# Altium PCB K10P100最小系统V1.0.PcbDoc (part 2 of 2)
Units mil, origin at the board's own origin, x right, y up, seen from the top; angles counter-clockwise.
Board outline 4763.81 x 2088.61 mil, 2 copper layers (Top Layer, Bottom Layer); 125 components, 121 nets, 468 pads, 200 vias.
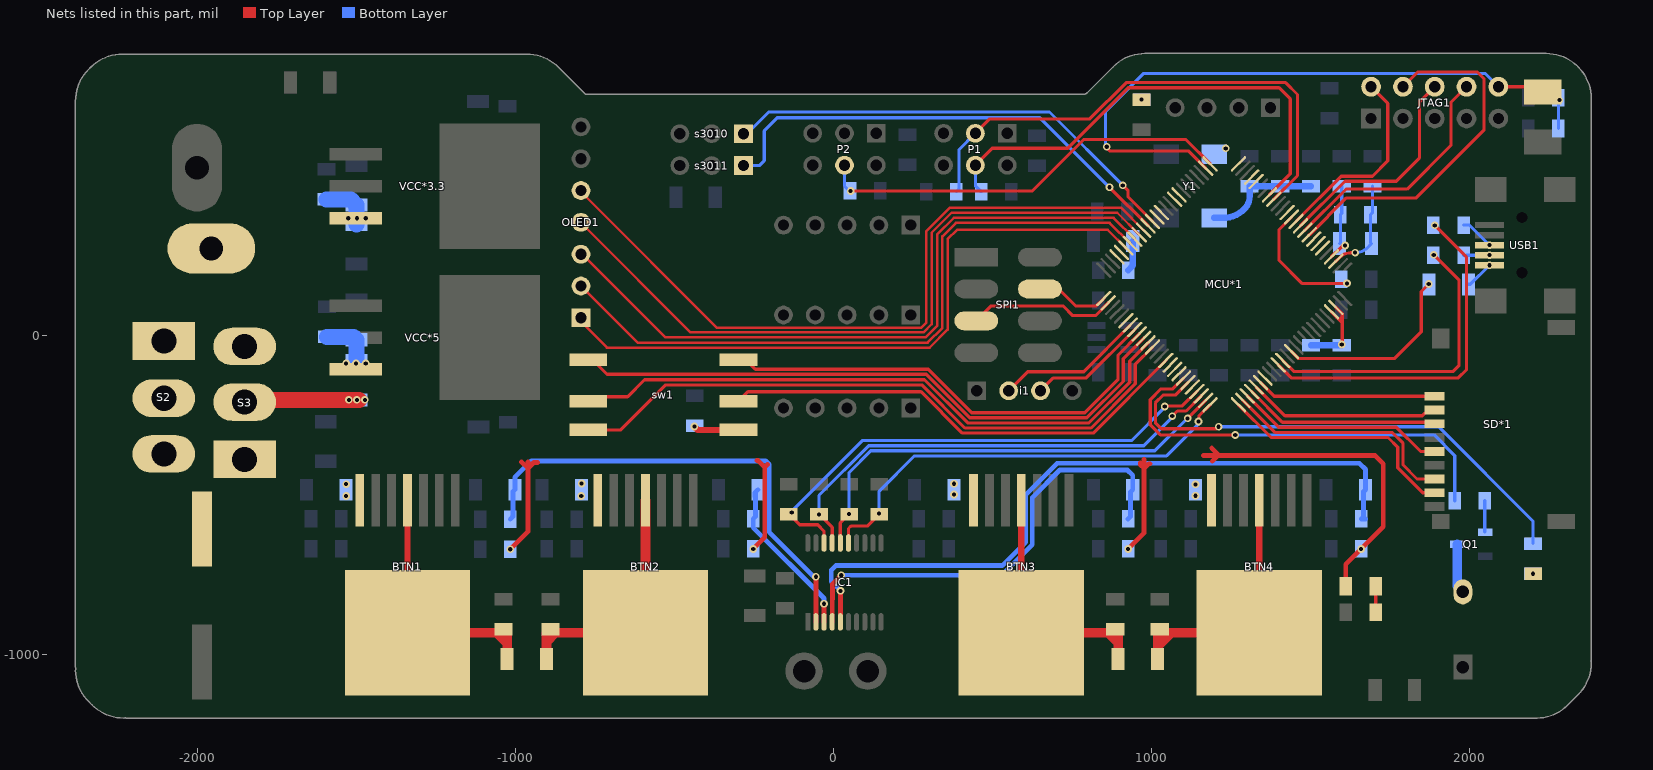
[diagram p2: the nets of this part, all layers, seen from the top]

## Via types
v1: diameter 24, hole 13, Top Layer to Bottom Layer, 198 vias
v2: diameter 39.37, hole 39.37, Top Layer to Bottom Layer, 2 vias

## Nets (pads, with @x,y where several pads share a name; then routed paths per layer and width w, separated by ;. In a path a pad name is that pad's centre, name@x,y a point inside that pad or via, vN(x,y) a via of type N, cw(c..) or ccw(c..) an arc to the next point about the centre after c; other vN are vias at no path point) (continued)
NetC10_2: C10.2 L1.2 MCU*1.22 MCU*1.23 | length 283.5
  Top Layer w10: MCU*1.22@1565.2,76.1 1590.33,50.96 ; MCU*1.23@1579.12,90.02 1599.41,69.73 1599.41,60.04 ; v1(1597.44,-26.57) 1599.41,-24.61 1599.41,41.89 ; 1590.33,50.96 1599.41,41.89 ; 1590.33,50.96 1599.41,60.04 ; 1599.41,41.89 1599.41,60.04
  Bottom Layer w20: C10.2@1500.98,-29.53 L1.2@1597.44,-29.53
NetC15_2: C15.2 C16.2 L2.2 Y1.4 | length 371.7
  Bottom Layer w20: Y1.4@1196.26,371.06 1224.8,371.06 ccw(c1224.8,465.16) 1291.34,398.62 ccw(c1250.94,439.02) 1308.07,439.02 C16.2@1308.07,470.47 C15.2@1404.53,470.47 L2.2@1500.98,470.47
NetC17_2: C17.2 MCU*1.28 R7.1 Y2.1 | length 314.2
  Top Layer w10: MCU*1.28@1579.12,234.78 1592.12,247.78 cw(c1625.99,213.89) 1625.99,261.81 v1(1639.76,261.81)
  Bottom Layer w10: v1(1639.76,261.81) ccw(c1639.76,316.46) 1678.41,277.82 Y2.1@1690.94,290.35 1687.99,293.31 R7.1@1687.99,380.91 1693.9,386.81 C17.2@1693.9,470.47
NetC18_2: C18.2 MCU*1.29 R7.2 Y2.2 | length 239.9
  Top Layer w10: MCU*1.29@1565.2,248.7 1595.76,279.27 cw(c1608.27,266.77) v1(1608.27,284.45)
  Bottom Layer w10: Y2.2@1590.94,290.35 1593.5,292.91 R7.2@1593.5,380.91 1597.44,384.84 C18.2@1597.44,470.47
NetC31_1: C31.1 C33.2 F2.2 VCC*5.3 | length 161.1
  Bottom Layer w50: C33.2@-1591.54,-2.95 -1507.87,-2.95 C31.1@-1499.02,-11.81 F2.2@-1499.02,-76.77
  other v1: -1531.5,-86.61 -1500.49,-86.61 -1469.49,-86.61
NetC35_1: C35.1 C37.2 F3.2 VCC*3.3.3 | length 161.9
  Bottom Layer w50: C37.2@-1592.52,429.13 -1516.73,429.13 C35.1@-1499.02,411.42 F3.2@-1499.02,350.39
  other v1: -1524.61,370.08 -1497.05,370.08 -1469.49,370.08
NetD1_2: D1.2 F1.2 | length 97.7
  Bottom Layer w20: F1.2@926.18,206.69 940.94,221.46 D1.2@940.94,298.23
NetD3_1: D3.1 R1.1
  other v1: 968.5,743.11
NetD5_1: D5.1 R5.1
  other v1: 2198.82,-747.05
NetD6_2: D6.2 R21.2 | length 81.7
  Top Layer w10: R21.2@1704.72,-868.11 D6.2@1704.72,-786.42
NetD7_2: D7.2 IC1.4 R26.1 | length 1448.7
  Top Layer w15: IC1.4@-3.78,-898.62 -3.78,-827.6 -2.95,-826.77 -2.95,-779.53 v1(24.61,-751.97)
  Bottom Layer w15: v1(24.61,-751.97) 529.53,-751.97 625.16,-656.33 625.16,-507.71 711.71,-421.17 924.12,-421.17 940.94,-437.99 D7.2@940.94,-483.27 934.06,-490.16 934.06,-566.93 R26.1@926.18,-574.8
NetD8_2: D8.2 IC1.5 R27.2 | length 2263.2
  Top Layer w15: IC1.5@21.81,-898.62 22.55,-897.89 v1(22.55,-801.18)
  Bottom Layer w15: v1(22.55,-801.18) -6.89,-771.74 -6.89,-735.59 7.24,-721.46 530.34,-721.46 604.16,-647.63 604.16,-499.01 703.01,-400.17 1653.12,-400.17 1672.24,-419.29 D8.2@1672.24,-483.27 1666.34,-489.17 1666.34,-567.91 R27.2@1659.45,-574.8 R27.2@1673.23,-574.8
NetD9_2: D9.2 IC1.2 R36.1 | length 1522.8
  Top Layer w15: IC1.2@-54.96,-898.62 -55.03,-898.56 -55.03,-756.96 v1@-54.96,-756.89
  Bottom Layer w15: R36.1@-1015.75,-575.79 -1006.89,-566.93 -1006.89,-489.17 D9.2@-1000.98,-483.27 -1000.98,-443.9 -949.8,-392.72 -212.6,-392.72 -201.77,-403.54 -201.77,-617.14 -62.03,-756.89 v1(-55.12,-756.89)
NetD10_2: D10.2 IC1.3 R37.2 | length 539.3
  Top Layer w15: IC1.3@-29.37,-898.62 v1@-29.37,-841.54
  Bottom Layer w15: D10.2@-247.05,-504.92 -247.05,-493.11 D10.2@-237.2,-483.27 -245.08,-491.14 -245.08,-567.91 R37.2@-251.97,-574.8 -251.97,-602.36 -29.53,-824.8 v1(-29.53,-841.54)
NetLS1_2: LS1.2A Q1.3 | length 156.9
  Bottom Layer w30: Q1.3@1960.63,-654.53 1960.63,-786.42 LS1.2A@1978.35,-804.13
NetQ1_2: Q1.1 R17.1 | length 97.4
  Bottom Layer w10: Q1.1@2047.24,-615.16 R17.1@2047.24,-517.72
NetR2_1: R2.1 USB1.3 | length 107.8
  Bottom Layer w10: R2.1@1980.32,348.43 1999.01,348.43 v1(2062.01,285.43)
NetR3_1: R3.1 USB1.2 | length 81.7
  Bottom Layer w10: R3.1@1980.32,253.94 v1(2062.01,253.93)
NetR8_2: R8.2 sw1.4 | length 143.3
  Top Layer w20: v1(-437.01,-284.45) -426.18,-295.28 sw1.4@-298.23,-295.28
OLEDCLK: MCU*1.66 OLED1.5 | length 2317.2
  Top Layer w8: OLED1.5@-793.31,445.28 -779.92,458.66 -779.92,439.37 -366.97,26.42 276.78,26.42 292.32,41.96 292.32,329.26 365.37,402.32 904.92,402.32 MCU*1.66@975.01,332.22
OLEDCS: MCU*1.70 OLED1.1 | length 2105.9
  Top Layer w8: OLED1.1@-785.43,53.15 -785.43,37.4 -711.45,-36.58 302.88,-36.58 359.25,19.79 359.25,304.13 388.78,333.66 862.21,333.66 MCU*1.70@919.34,276.54
  Top Layer w10: OLED1.1@-793.31,45.28 OLED1.1@-785.43,53.15
OLEDDC: MCU*1.69 OLED1.2 | length 2163.4
  Top Layer w8: OLED1.2@-793.31,157.48 -615.24,-20.58 296.25,-20.58 342.52,25.69 342.52,312.99 384.84,355.32 868.4,355.32 MCU*1.69@933.25,290.46
  Top Layer w10: OLED1.2@-793.31,145.28 OLED1.2@-793.31,157.48
OLEDMISO: MCU*1.67 OLED1.4 | length 2264.8
  Top Layer w8: OLED1.4@-780.32,358.27 -780.32,343.31 -448.43,11.42 282.99,11.42 309.06,37.48 309.06,324.78 371.59,387.32 892.08,387.32 MCU*1.67@961.09,318.3
  Top Layer w10: OLED1.4@-793.31,345.28 OLED1.4@-780.32,358.27
OLEDRST: MCU*1.68 OLED1.3 | length 2213.8
  Top Layer w8: OLED1.3@-779.72,258.86 -779.72,247.24 -527.9,-4.58 289.62,-4.58 325.79,31.58 325.79,318.89 378.22,371.32 880.24,371.32 MCU*1.68@947.17,304.38
  Top Layer w10: OLED1.3@-793.31,245.28 OLED1.3@-779.72,258.86
OUT1: BTN1.4 BTN1.8 C12.1 Ry2.1 | length 867
  Top Layer w20: BTN1.8@-1338.58,-932.44 BTN1.4@-1338.58,-516.65
  Top Layer w30: BTN1.8@-1338.58,-932.44 C12.1@-1058.7,-932.44 ; Ry2.1@-1025.59,-1015.75 -1025.59,-965.55 ; C12.1@-1058.7,-932.44 -1025.59,-965.55 ; C12.1@-1058.7,-932.44 -1046.61,-932.44 C12.1@-1036.42,-922.24 -1025.59,-933.07 -1025.59,-965.55
OUT2: BTN2.4 BTN2.8 C7.1 Ry2.2 | length 875.4
  Top Layer w30: Ry2.2@-901.57,-1015.75 -901.57,-961.61 ; -855.32,-932.44 C7.1@-872.4,-932.44 ; BTN2.4@-590.55,-516.65 BTN2.8@-590.55,-932.44 C7.1@-872.4,-932.44 ; -901.57,-961.61 C7.1@-872.4,-932.44 ; -901.57,-961.61 -901.57,-935.04 C7.1@-888.78,-922.24 -878.58,-932.44 C7.1@-872.4,-932.44
OUT3: BTN3.4 BTN3.8 C11.1 Ry1.1 | length 856.5
  Top Layer w20: BTN3.8@590.55,-932.44 BTN3.4@590.55,-516.65
  Top Layer w30: BTN3.8@590.55,-932.44 C11.1@863.54,-932.44 ; Ry1.1@894.69,-1015.75 894.69,-963.58 ; C11.1@863.54,-932.44 894.69,-963.58 ; C11.1@863.54,-932.44 875.63,-932.44 C11.1@885.83,-922.24 894.69,-931.1 894.69,-963.58
OUT4: BTN4.4 BTN4.8 C25.2 Ry1.2 | length 892
  Top Layer w20: C25.2@1018.7,-929.13 C25.2@1025.59,-922.24 C25.2@1035.79,-932.44 ; BTN4.8@1338.58,-932.44 BTN4.4@1338.58,-516.65
  Top Layer w30: Ry1.2@1018.7,-1015.75 1018.7,-976.73 ; C25.2@1018.7,-929.13 1018.7,-976.73 ; C25.2@1035.79,-932.44 1062.99,-932.44 ; BTN4.8@1338.58,-932.44 1062.99,-932.44 ; 1018.7,-976.73 1062.99,-932.44
PCS0: MCU*1.76 SPI1.6 | length 232.3
  Top Layer w10: SPI1.6@649.13,147.52 707.8,147.52 760.83,94.49 826.37,94.49 MCU*1.76@849.74,117.86
PTA0: JTAG1.4 MCU*1.34 | length 1129.4
  Top Layer w10: MCU*1.34@1495.6,318.3 1496.43,318.3 1612.18,434.06 1831.69,434.06 2044.29,646.65 2044.29,809.06 2023.62,829.72 1836.22,829.72 JTAG1.4@1789.76,783.27
PTA1: JTAG1.8 MCU*1.35 | length 774
  Top Layer w10: MCU*1.35@1481.68,332.22 1611.08,461.61 1803.15,461.61 1940.94,599.41 1940.94,734.45 JTAG1.8@1989.76,783.27
PTA2: JTAG1.6 MCU*1.36 | length 706.2
  Top Layer w10: MCU*1.36@1467.76,346.14 1607.84,486.22 1768.7,486.22 1841.54,559.05 1841.54,735.04 JTAG1.6@1889.76,783.27
PTA3: JTAG1.2 MCU*1.37 | length 621.8
  Top Layer w10: MCU*1.37@1453.84,360.06 1596,502.22 1694.15,502.22 1742.13,550.2 1742.13,730.91 JTAG1.2@1689.76,783.27
PTA4: MCU*1.38 R4.2 | length 396.4
  Top Layer w10: MCU*1.38@1439.92,373.98 1400.59,334.65 1400.59,237.2 1472.44,165.35 v1(1614.17,165.35)
PTA5: MCU*1.39
PTA12: MCU*1.42 P1.3 R13.1 | length 1662.1
  Top Layer w10: P1.3@446.26,636.81 491.54,682.09 806.12,682.09 920.3,796.26 1421.26,796.26 1458.66,758.86 1458.66,504.07 MCU*1.42@1384.24,429.65
  Bottom Layer w10: R13.1@385.83,453.74 394.68,462.6 394.68,585.24 P1.3@446.26,636.81
PTA13: MCU*1.43 P1.4 R15.2 | length 1524.5
  Top Layer w10: P1.4@446.26,536.81 499.27,589.82 736.48,589.82 926.92,780.26 1400.84,780.26 1436.02,745.08 1436.02,509.27 MCU*1.43@1370.32,443.57
  Bottom Layer w10: P1.4@446.26,536.81 446.26,472.05 R15.2@464.57,453.74
PTA16: MCU*1.46
PTA17: MCU*1.47
PTA18: MCU*1.50 Y1.3
  other v1: 1233.27,589.57
PTA19: MCU*1.51 P2.4 R9.1 | length 1318.6
  Top Layer w10: v1(54.13,455.71) 625,455.71 786.78,617.49 1107.33,617.49 MCU*1.51@1183.8,541.01
  Bottom Layer w10: P2.4@34.84,536.81 34.84,471.06 R9.1@52.17,453.74
PTB10: MCU*1.58
PTB11: MCU*1.59
PTB16: MCU*1.62
PTB17: MCU*1.63
PTB18: MCU*1.64 s3010.1 | length 1467.5
  Top Layer w10: v1(909.45,473.43) 926.18,456.69 926.18,436.73 MCU*1.64@1002.85,360.06
  Bottom Layer w10: s3010.1@-282.48,635.83 -271.65,635.83 -203.74,703.74 679.13,703.74 v1(909.45,473.43)
PTB19: MCU*1.65 s3011.1 | length 1529.3
  Top Layer w10: v1(867.55,467.52) MCU*1.65@988.93,346.14
  Bottom Layer w10: s3011.1@-282.48,535.43 -233.27,535.43 -217.52,551.18 -217.52,644.68 -176.18,686.02 649.05,686.02 v1(867.55,467.52)
PTC1: MCU*1.71
PTC2: MCU*1.72
PTC5: MCU*1.77 SPI1.3 | length 463.2
  Top Layer w10: SPI1.3@449.13,47.52 496.1,94.49 721.46,94.49 751.97,63.98 823.69,63.98 MCU*1.77@863.66,103.94
PTC9: MCU*1.81
PTC10: i1.2 MCU*1.82 | length 468
  Top Layer w10: i1.2@550.79,-172.24 610.83,-112.2 786.71,-112.2 MCU*1.82@933.25,34.34
PTC11: i1.3 MCU*1.83 | length 376.2
  Top Layer w10: i1.3@650.79,-172.24 691.32,-131.72 795.03,-131.72 MCU*1.83@947.17,20.42
PTC12: MCU*1.84 sw1.6 | length 1470.1
  Top Layer w10: sw1.6@-287.4,-62.01 -245.08,-104.33 298.23,-104.33 435.04,-241.14 789.97,-241.14 894.68,-136.43 894.68,-59.9 MCU*1.84@961.09,6.5
PTC13: MCU*1.85 sw1.1 | length 1972.1
  Top Layer w10: sw1.1@-770.67,-61.02 -711.36,-120.33 291.58,-120.33 428.39,-257.14 796.6,-257.14 910.68,-143.06 910.68,-71.74 MCU*1.85@975.01,-7.42
PTC14: MCU*1.86 sw1.2 | length 1980.7
  Top Layer w10: sw1.2@-770.67,-190.94 -646.65,-190.94 -593.5,-137.8 286.42,-137.8 421.76,-273.14 803.23,-273.14 931.1,-145.27 931.1,-79.16 MCU*1.86@988.93,-21.33
PTC15: MCU*1.87 sw1.3 | length 2029
  Top Layer w10: sw1.3@-770.67,-295.28 -668.31,-295.28 -526.83,-153.8 277.81,-153.8 413.16,-289.14 809.85,-289.14 948.82,-150.18 948.82,-89.29 MCU*1.87@1002.85,-35.25
PTC16: MCU*1.90 sw1.5 | length 1503.4
  Top Layer w10: sw1.5@-298.23,-204.72 -268.7,-175.2 275.59,-175.2 405.54,-305.14 816.48,-305.14 MCU*1.90@1044.61,-77.01
PTC17: MCU*1.91
PTC18: MCU*1.92
PTD0: MCU*1.93
PTD1: MCU*1.94 R17.2 | length 1350.1
  Top Layer w10: MCU*1.94@1100.29,-132.69 1066.64,-166.34 1029.53,-166.34 996.06,-199.8 996.06,-279.53 1027.56,-311.02 v1(1262.8,-311.02)
  Bottom Layer w10: v1(1262.8,-311.02) 1887.8,-311.02 1952.76,-375.98 R17.2@1952.76,-517.72
PTD2: D5.2 MCU*1.95 | length 1581.8
  Top Layer w10: MCU*1.95@1114.21,-146.61 1075.78,-185.04 1037.4,-185.04 1012.06,-210.38 1012.06,-272.9 1030.86,-291.7 1204.36,-291.7 v1(1210.63,-285.43)
  Bottom Layer w10: v1(1210.63,-285.43) 1902.56,-285.43 2198.82,-581.69 D5.2@2198.82,-652.56
PTD3: MCU*1.96
PTD4: IC1.18 MCU*1.97 R42.1 | length 1611.1
  Top Layer w10: R42.1@-139.76,-560.04 -106.3,-593.5 -49.21,-593.5 -29.37,-613.35 IC1.18@-29.37,-650.59 ; v1(1041.34,-221.46) 1042.94,-219.86 1096.64,-219.86 MCU*1.97@1142.05,-174.45
  Bottom Layer w10: v1(-130.91,-555.12) -135.83,-555.12 90.32,-328.97 936.78,-328.97 v1@1042.82,-222.93
PTD5: IC1.17 MCU*1.98 R43.1 | length 1499.7
  Top Layer w10: R43.1@-45.28,-560.04 -3.78,-601.54 IC1.17@-3.78,-650.59 ; v1(1064.96,-251.97) 1081.07,-235.86 1108.48,-235.86 MCU*1.98@1155.97,-188.37
  Bottom Layer w10: v1(-45.28,-561.02) -45.28,-500.99 110.75,-344.97 975.9,-344.97 v1@1066.93,-253.94
PTD6: IC1.16 MCU*1.99 R44.1 | length 1446.1
  Top Layer w10: IC1.16@21.81,-650.59 21.81,-587.44 R44.1@49.21,-560.04 ; v1(1113.31,-258.86) MCU*1.99@1169.88,-202.29
  Bottom Layer w10: v1(49.21,-559.06) 49.21,-429.13 117.38,-360.97 1010.09,-360.97 v1@1112.76,-258.3
PTD7: IC1.15 MCU*1.100 R45.1 | length 1402
  Top Layer w10: IC1.15@47.4,-650.59 47.4,-605.16 55.12,-597.44 106.3,-597.44 R45.1@143.7,-560.04 ; v1(1147.64,-268.7) 1147.64,-272.64 1148.62,-273.62 1148.62,-251.39 MCU*1.100@1183.8,-216.21
  Bottom Layer w10: v1(143.7,-558.07) 143.7,-488.19 254.92,-376.97 1047.24,-376.97 v1@1149.61,-274.61
PTE0: MCU*1.1 SD*1.8 | length 769.2
  Top Layer w10: MCU*1.1@1272.89,-216.21 1375.58,-318.9 1743.11,-318.9 1773.62,-349.41 1773.62,-414.37 1851.95,-492.7 SD*1.8@1889.5,-492.7
PTE1: MCU*1.2 SD*1.7 | length 744.8
  Top Layer w10: MCU*1.2@1286.81,-202.29 1387.42,-302.9 1755.65,-302.9 1790.35,-337.6 1790.35,-405.51 1834.24,-449.39 SD*1.7@1889.5,-449.39
PTE2: MCU*1.3 SD*1.5 | length 661
  Top Layer w10: MCU*1.3@1300.73,-188.37 1399.26,-286.9 1769.18,-286.9 1845.06,-362.78 SD*1.5@1889.5,-362.78
PTE3: MCU*1.4 SD*1.3 | length 617
  Top Layer w10: MCU*1.4@1314.65,-174.45 1411.1,-270.9 1884.24,-270.9 SD*1.3@1889.5,-276.17
PTE4: MCU*1.5 SD*1.2 | length 605.9
  Top Layer w10: MCU*1.5@1328.57,-160.53 1419.02,-250.98 1850.39,-250.98 1868.52,-232.86 SD*1.2@1889.5,-232.86
PTE5: MCU*1.6 SD*1.1 | length 564.8
  Top Layer w10: MCU*1.6@1342.49,-146.61 1385.43,-189.55 SD*1.1@1889.5,-189.55
PTE6: MCU*1.7
PTE24: MCU*1.31
PTE25: MCU*1.32
PTE26: MCU*1.33
RESET: C14.2 JTAG1.10 MCU*1.52 R6.1 S1.2 | length 1999.2
  Top Layer w10: v1(859.25,594.49) 855.32,594.49 868.11,581.69 1115.28,581.69 MCU*1.52@1169.88,527.09 ; JTAG1.10@2089.76,783.27 2212.83,783.27 S1.2@2229.37,766.73
  Bottom Layer w10: v1(859.25,594.49) 855.32,594.49 855.32,705.71 974.87,825.27 2047.76,825.27 JTAG1.10@2089.76,783.27 ; C14.2@2278.54,652.56 2278.54,738.19 v1(2281.5,741.14)
USB0_DM: MCU*1.11 R3.2 | length 956.8
  Top Layer w10: MCU*1.11@1412.08,-77.01 1446.29,-111.22 1947.83,-111.22 1966.54,-92.52 1966.54,175.2 v1(1886.81,254.92)
USB0_DP: MCU*1.10 R2.2 | length 1114.3
  Top Layer w10: MCU*1.10@1398.16,-90.93 1439.12,-131.89 1963.58,-131.89 1990.16,-105.32 1990.16,247.05 v1(1889.76,347.44)
USB5V: D4.1 USB1.1 | length 90.8
  Bottom Layer w10: D4.1@1996.06,162.4 2001.97,162.4 v1(2062.01,222.44)
VBAT: S2.0 S2.1 S3.2 T*.1
VCC: F2.1 S3.0 S3.1 | length 366.3
  Top Layer w50: S3.1@-1850.39,-207.8 -1850.39,-201.77 v1@-1490.16,-201.77
  other v1: -1522.64,-200.79 -1497.54,-200.79 -1472.44,-200.79
VCC_M: BTN1.7 BTN2.7 BTN3.7 BTN4.7 C22.1 C23.1 C24.1 C27.1 C28.1 D6.1 R22.2 R23.1 R32.2 R33.1 S2.2 | length 2099.5
  Top Layer w15: v1(-1015.75,-670.28) -959.65,-614.17 -959.65,-416.34 ; -980.32,-395.67 -959.65,-416.34 ; -959.65,-395.67 -959.65,-416.34 ; -930.12,-397.64 -940.94,-397.64 -959.65,-416.34 ; v1(-251.97,-669.29) -215.55,-632.87 -215.55,-412.4 ; -240.16,-391.73 -236.22,-391.73 -215.55,-412.4 ; -206.69,-403.54 -215.55,-412.4 ; v1(926.18,-669.29) 976.38,-619.09 976.38,-416.34 ; 964.57,-398.62 964.57,-404.53 976.38,-416.34 ; 976.38,-387.8 976.38,-416.34 ; 995.08,-401.57 991.14,-401.57 976.38,-416.34 ; 1163.39,-375.98 1208.66,-375.98 ; 1188.98,-352.36 1212.6,-375.98 ; 1190.94,-393.7 1208.66,-375.98 ; D6.1@1610.24,-786.42 1610.24,-717.52 v1(1658.46,-669.29) 1728.35,-599.41 1728.35,-401.57 1702.76,-375.98 1212.6,-375.98 ; 1208.66,-375.98 1212.6,-375.98
  other v1: -1531.5,-502.95 -792.32,-502.95 1137.8,-501.97 378.94,-498.03 1137.8,-466.54 -1531.5,-465.55 378.94,-464.57 -791.34,-463.58
VREGIN: D4.2 MCU*1.13 | length 611.1
  Top Layer w10: MCU*1.13@1439.92,-49.17 1461.12,-70.37 1764.27,-70.37 1847.44,12.8 1847.44,139.76 v1(1871.06,163.39)
pads on no net: MCU*1.14 MCU*1.15 MCU*1.16 MCU*1.17 MCU*1.18 MCU*1.19 MCU*1.20 MCU*1.21 MCU*1.26 MCU*1.27 P1.5 P1.6 P2.3 P2.5 P2.6 SD*1.10 SD*1.11 SD*1.12 SD*1.13 USB1.5 USB1.6 USB1.7 USB1.8 USB1.9 USB1.MH1 USB1.MH2 Y1.1
copper on no net:
  other v2: 2302.89,-473.02 2302.89,-158.05

## Polygon pours and split planes (outlines as drawn)
PTA18 on Top Layer "Keep-Out Layer-No Net" (solid, remove dead copper, pour order 44): 1234.25,598.43 1260.83,598.43 1297.24,562.01 1252.95,517.72 1250,517.72 1224.41,543.31 1224.41,594.49
VCC_M on Top Layer "Keep-Out Layer-No Net" (solid, pour order 27): 1735.24,-414.37 1735.24,-345.47 1723.43,-333.66 -1721.46,-333.66 -1725.39,-333.66 -1727.36,-335.63 -1727.36,-353.35
VCC_M on Top Layer "Keep-Out Layer-No Net" (solid, pour order 40): -1506.89,-341.54 -1727.36,-341.54 -1727.36,-518.7 -1695.87,-550.2 -1675.2,-529.53 -1570.87,-529.53
VCC_M on Top Layer "Keep-Out Layer-No Net" (solid, remove dead copper, pour order 28): -2156.5,-312.01 -2058.07,-312.01 -2050.2,-312.01 -2005.91,-356.3 -2005.91,-429.13 -1949.8,-485.24 -1948.82,-486.22 -1948.82,-725.39 -2106.3,-725.39 -2181.1,-650.59 -2204.72,-626.97 -2204.72,-365.16
VCC_M on Top Layer "Keep-Out Layer-No Net" (solid, remove dead copper, pour order 30): -1984.25,-725.89 -1610.2,-725.89 -1474.56,-599.9 -1472.44,-597.93 -1472.44,-433.56 -1662.12,-433.56 -1699.21,-468.01 -1719.34,-486.71 -1984.25,-486.71
VCC_M on Top Layer "Keep-Out Layer-No Net" (solid, remove dead copper, pour order 31): -1472.44,-433.56 -1472.44,-413.39 -1468.5,-409.45 -862.2,-409.45 1115.16,-409.45 1133.86,-428.15 1135.83,-430.12 1135.83,-516.73 1169.29,-516.73 1174.21,-521.65 1175.2,-522.64 1175.2,-599.41 1201.77,-599.41 1201.77,-337.6 -1566.93,-337.6 -1671.26,-441.93 -1661.42,-451.77 -1530.51,-451.77
VCC_M on Top Layer "Keep-Out Layer-No Net" (solid, remove dead copper, pour order 32): -812.6,-516.73 -812.6,-416.34 -830.71,-401.57 -811.39,-385.83 -726.86,-385.83 -722.03,-385.83 -713.58,-392.72 -713.58,-409.45 -729.28,-422.24 -729.28,-439.96 -729.28,-600.39 -763.09,-600.39 -763.09,-545.28 -765.5,-543.31
VCC_M on Top Layer "Keep-Out Layer-No Net" (solid, remove dead copper, pour order 33): 373.03,-517.72 373.03,-447.83 373.03,-420.28 358.27,-405.51 379.92,-383.86 447.83,-383.86 460.63,-383.86 472.44,-395.67 472.44,-404.53 467.52,-409.45 454.72,-422.24 454.72,-599.41 427.17,-599.41 427.17,-540.35
VBAT on Top Layer "Keep-Out Layer-No Net" (solid, pour order 45): -1961.61,355.32 -1750.98,355.32 -1750.98,-36.42 -1750.98,-93.5 -2004.92,-93.5 -2003.94,-93.5 -2003.94,-252.95 -2003.94,-257.87 -2203.74,-257.87 -2203.74,355.32
VCC on Top Layer "Keep-Out Layer-No Net" (solid, remove dead copper, pour order 47): -1950.79,-148.62 -1750.98,-148.62 -1750.98,-445.87 -1750.98,-443.9 -1950.79,-443.9
EGND on Top Layer "Keep-Out Layer-No Net" (solid, remove dead copper, pour order 49): -2359.25,855.32 -2359.25,868.11 -1648.62,868.11 -1647.64,868.11 -1647.64,-332.68 -1727.36,-332.68 -1728.35,-332.68 -1728.35,388.78 -1728.35,390.75 -2223.43,390.75 -2223.43,-489.17 -2223.43,-1181.1 -2362.2,-1181.1
EGND on Top Layer "Keep-Out Layer-No Net" (solid, remove dead copper, pour order 50): -2265.75,-818.9 -1444.88,-818.9 -1444.88,-420.28 -1444.88,-394.07 -713.58,-394.07 1760.83,-394.07 1760.83,-1190.94 1760.83,-1181.1 -2276.57,-1181.1
GND on Top Layer "Keep-Out Layer-No Net" (solid, remove dead copper, pour order 29): -1649.61,870.08 -1649.61,-334.65 -1534.45,-334.65 1760.83,-334.65 1760.83,-1181.1 2362.2,-1181.1 2364.17,-1181.1 2364.17,870.08
EGND on Bottom Layer "Keep-Out Layer-No Net" (solid, remove dead copper, pour order 34): -2108.27,-789.37 -1754.92,-789.37 -1677.17,-711.61 -1677.17,-449.8 -1631.89,-449.8 -1620.08,-461.61 -1621.06,-462.6 -1621.06,-697.83 -1606.3,-712.6 -1226.38,-712.6 -1202.76,-688.98 -1202.76,-434.06 -1175.2,-434.06 -1175.2,-688.98 -991.14,-873.03 158.46,-873.03 236.22,-873.03 313.98,-950.79 316.93,-953.74 316.93,-1184.06 -2277.56,-1184.06 -2365.16,-1096.46 -2367.13,-1094.49 -2367.13,-810.04
EGND on Bottom Layer "Keep-Out Layer-No Net" (solid, pour order 35): 236.22,-873.03 688.98,-873.03 702.76,-859.25 726.38,-835.63 726.38,-434.06 753.94,-434.06 753.94,-556.1 753.94,-841.54 786.42,-874.02 878.94,-874.02 1441.93,-874.02 1464.57,-851.38 1474.41,-841.54 1474.41,-434.06 1500.98,-434.06 1501.97,-435.04 1502.95,-436.02 1502.95,-541.34 1502.95,-841.54 1531.5,-870.08 1535.43,-874.02 1619.09,-874.02 1736.22,-874.02 1757.87,-895.67 1758.86,-896.65 1758.86,-1184.06 209.65,-1184.06 195.87,-1170.28
EGND on Bottom Layer "Keep-Out Layer-No Net" (solid, remove dead copper, pour order 36): 1474.41,-434.06 1554.13,-434.06 1568.9,-448.82 1568.9,-517.72 1526.57,-517.72 1502.95,-541.34 1474.41,-541.34
EGND on Bottom Layer "Keep-Out Layer-No Net" (solid, remove dead copper, pour order 37): 726.38,-434.06 822.83,-434.06 837.6,-448.82 837.6,-516.73 778.54,-516.73 753.94,-541.34 726.38,-541.34
EGND on Bottom Layer "Keep-Out Layer-No Net" (solid, pour order 38): -455.71,-435.04 -455.71,-856.3 -474.41,-875 -462.6,-886.81 -381.89,-886.81 -399.61,-886.81 -421.26,-865.16 -427.17,-859.25 -427.17,-434.06
EGND on Bottom Layer "Keep-Out Layer-No Net" (solid, pour order 39): -1187.99,-435.04 -1117.13,-435.04 -1104.33,-447.83 -1104.33,-517.72 -1159.45,-517.72 -1174.21,-532.48 -1203.74,-532.48
EGND on Bottom Layer "Keep-Out Layer-No Net" (solid, pour order 41): -455.71,-435.04 -354.33,-435.04 -340.55,-448.82 -340.55,-517.72 -416.34,-517.72 -427.17,-528.54 -454.72,-528.54
EGND on Bottom Layer "Keep-Out Layer-No Net" (solid, remove dead copper, pour order 42): -2001.97,389.76 -1715.55,389.76 -1715.55,866.14 -1715.55,868.11 -2356.3,868.11 -2362.2,868.11 -2362.2,313.98 -2362.2,-1181.1 1757.87,-1181.1 1757.87,-1085.63 1757.87,-333.49 1599.41,-333.49 -1727.36,-333.49 -1727.36,-477.36 -1727.36,-488.19 -1942.91,-488.19 -2223.43,-488.19 -2223.43,-298.23 -2223.43,389.76 -2002.95,389.76
EGND on Bottom Layer "Keep-Out Layer-No Net" (solid, pour order 43): -1789.37,864.17 -1787.4,866.14 -1649.61,866.14 -1649.61,-363.19 -1648.62,-364.17 -1658.55,-374.1 -1727.36,-374.1 -1727.36,626.97 -1761.81,661.42
VBAT on Bottom Layer "Keep-Out Layer-No Net" (solid, pour order 46): -2203.74,355.32 -1750.98,355.32 -1750.98,-93.5 -2003.94,-93.5 -2003.94,-258.86 -2003.94,-257.87 -2203.74,-257.87 -2204.72,-257.87 -2204.72,354.33
VCC on Bottom Layer "Keep-Out Layer-No Net" (solid, remove dead copper, pour order 48): -1950.79,-146.65 -1750,-146.65 -1750,-147.64 -1750,-449.8 -1749.02,-449.8 -1948.82,-449.8 -1948.82,-448.82
GND on Bottom Layer "Keep-Out Layer-No Net" (solid, remove dead copper, pour order 26): -1650.59,867.13 -1650.59,-333.49 1757.87,-333.49 1758.86,-333.49 1758.86,-1191.93 2368.11,-1191.93 2365.16,-1191.93 2365.16,868.11

## Keep-outs
Keep-Out Layer:
  lines w39.37: -2362.2,-1050.2 ccw(c-2243.39,-1050.2) -2327.41,-1134.21 -2315.87,-1145.75 ccw(c-2230.51,-1060.39) -2230.51,-1181.1 ; -2362.2,-1040.35 -2362.2,738.39 cw(c-2241.49,738.39) -2326.85,823.74 -2319.8,830.79 cw(c-2234.45,745.43) -2234.45,866.14 -963.39,866.14 cw(c-963.39,745.43) -878.03,830.79 -787.4,740.16 787.4,740.16 ccw(c787.4,773.42) 810.92,749.9 893.78,832.75 cw(c979.13,747.4) 979.13,868.11 2240.35,868.11 cw(c2240.35,747.4) 2325.71,832.75 2326.85,831.62 cw(c2241.49,746.26) 2362.2,746.26 ; -2221.46,-1181.1 2195.87,-1181.1 ; 2082.68,-1181.1 2211.53,-1181.1 ccw(c2211.53,-1066.85) 2292.32,-1147.64 2326.85,-1113.11 ccw(c2241.49,-1027.76) 2362.2,-1027.76 ; 2362.2,-1014.76 2362.2,742.13

## Other copper
Top Layer:
  text "武汉理工大学" at -2268.7,755.91 h50
  text "2016" at -2267.72,714.57 h50
  text "张艳松" at -2267.72,674.21 h50
  text "袁佳威" at -2269.68,630.91 h50
  text "李锐戈" at -2268.7,581.69 h50

## Silkscreen, mask and mechanical layers (free items; w line width, h text height)
Top Overlay:
  lines w10: -17.72,687.99 -17.72,710.63 77.76,710.63 77.76,689.19 ; 407.48,687.99 407.48,710.63 479.33,710.63 479.33,687.99
  text "0R" at -1664.37,713.58 h50
  text "GND" at -698.82,633.86 h50
  text "GND" at 1143.7,620.08 h50
  text "5V" at 1050.2,618.11 h50
  text "GND" at 235.24,605.32 h50 r90
  text "GND" at 680.12,603.35 h50 r90
  text "B18" at -192.91,602.36 h50 r90
  text "LED_B" at 910.43,580.71 h50
  text "GND" at -556.1,556.1 h50 r90
  text "3.3V" at -705.71,537.4 h50
  text "5V" at 233.27,511.81 h50 r90
  text "5V" at 679.13,508.86 h50 r90
  text "B19" at -193.9,502.95 h50 r90
  text "B20" at -697.83,434.06 h50
  text "5V" at -405.51,427.17 h50
  text "B21" at -695.87,334.65 h50
  text "3.3V" at -102.36,249.02 h50
  text "B0" at 20.67,249.02 h50
  text "GND" at -194.88,246.06 h50
  text "B3" at 121.06,246.06 h50
  text "B9" at 209.65,244.09 h50
  text "B22" at -692.91,228.35 h50
  text "B23" at -693.9,134.84 h50
  text "C0" at -682.09,35.43 h50
  text "B9" at 221.46,-35.43 h50
  text "GND" at -190.94,-36.42 h50
  text "3.3V" at -102.36,-36.42 h50
  text "B1" at 22.64,-36.42 h50
  text "B3" at 121.06,-37.4 h50
  text "GND" at 721.46,-268.7 h50
  text "C11" at 616.14,-270.67 h50
  text "3.3V" at 405.51,-271.65 h50
  text "C10" at 516.73,-271.65 h50
  text "GND" at -192.91,-330.71 h50
  text "3.3V" at -102.36,-330.71 h50
  text "B2" at 21.65,-330.71 h50
  text "B9" at 223.43,-330.71 h50
  text "B3" at 121.06,-331.69 h50
  text "10K" at -80.71,-414.37 h50
  text "10K" at -171.26,-415.35 h50
  text "10K" at 114.17,-415.35 h50
  text "10K" at 14.76,-416.34 h50
  text "LED_W" at 2296.26,-763.78 h50 r90
  text "104" at -995.08,-796.26 h50
  text "104" at 923.23,-801.18 h50
  text "104" at -185.04,-944.88 h50
  text "0R" at -271.65,-947.83 h50
  text "LED_R" at 1594.49,-957.68 h50
  text "0R" at 1735.24,-1059.06 h50
  text "+" at 2185.04,-1081.69 h70 r90
  text "330uF" at -1705.71,-1126.97 h50
Bottom Overlay:
  text "10K" at 2198.82,825.79 h50 r180
  text "0R" at -1617.13,717.52 h50
  text "104" at 1519.68,696.85 h50 r90
  text "104" at -978.35,632.87 h50 r270
  text "10uF" at -1209.65,614.17 h50 r270
  text "104" at 2190.94,606.3 h50 r180
  text "18pF" at 1689.96,597.44 h50
  text "103" at 1342.52,596.46 h50
  text "104" at 1445.87,596.46 h50
  text "10uH" at 1549.21,596.46 h50
  text "+" at -1141.73,545.28 h70 r270
  text "+" at -327.76,457.68 h70 r180
  text "10uF" at -1443.9,445.87 h50 r270
  text "102" at -1670.28,433.07 h50 r270
  text "1M" at 1772.64,406.5 h50 r90
  text "+" at -1452.76,403.54 h70 r270
  text "10uF" at -476.38,388.78 h50 r180
  text "104" at 745.08,350.39 h50 r270
  text "32KHZ" at 1769.68,349.41 h50 r90
  text "F" at -1574.8,308.07 h50 r180
  text "D" at 744.09,280.51 h50 r270
  text "FmA" at 785.43,246.06 h50 r90
  text "10K" at 1772.64,211.61 h50 r90
  text "104" at 1771.65,116.14 h50 r90
  text "10uF" at -1414.37,81.69 h50 r90
  text "104" at -1631.89,73.82 h50 r90
  text "470pF" at 750.98,48.23 h50 r270
  text "+" at 1039.37,9.84 h70
  text "+" at -1450.79,-54.13 h70 r270
  text "+" at -1140.75,-124.02 h70 r270
  text "+" at 787.4,-140.75 h70
  text "F" at -1552.17,-162.4 h50
  text "10uF" at 922.24,-200.79 h50
  text "103" at 1537.4,-202.76 h50
  text "10uH" at 1647.64,-202.76 h50
  text "10uF" at 1064.96,-203.74 h50
  text "104" at 1242.13,-204.72 h50
  text "104" at 1343.5,-204.72 h50
  text "104" at 1435.04,-204.72 h50
  text "D3V" at 1149.61,-205.71 h50
  text "104" at -978.35,-253.94 h50 r270
  text "10uF" at -1205.71,-268.7 h50 r270
  text "0R" at -1503.94,-341.54 h50
  text "D3.3V" at -163.39,-388.78 h50 r90
  text "D3.3V" at 1747.05,-389.76 h50 r90
  text "D3.3V" at -1193.9,-398.62 h50 r90
  text "10uF" at 1241.14,-406.5 h50 r90
  text "10uF" at -682.09,-418.31 h50 r90
  text "10uF" at -1694.88,-431.1 h50 r90
  text "10uF" at 219.49,-431.1 h50 r90
  text "D1" at 2023.62,-473.43 h50
  text "1K5" at 2125,-494.09 h50 r90
  text "D3.3V" at 696.85,-520.67 h50 r270
  text "510R" at 1244.09,-532.48 h50 r90
  text "510R" at -681.1,-533.46 h50 r90
  text "10K" at 1748.03,-536.42 h50 r90
  text "10K" at -1195.87,-539.37 h50 r90
  text "10K" at -165.35,-541.34 h50 r90
  text "470R" at 221.46,-541.34 h50 r90
  text "10K" at 731.3,-545.28 h50 r90
  text "470R" at -1727.36,-629.92 h50 r270
  text "10K" at -1197.83,-633.86 h50 r90
  text "10K" at 1747.05,-635.83 h50 r90
  text "10K" at 731.3,-638.78 h50 r90
  text "510R" at 1246.06,-639.76 h50 r90
  text "10K" at -161.42,-640.75 h50 r90
  text "510R" at -680.12,-646.65 h50 r90
  text "510R" at 218.5,-652.56 h50 r90
  text "510R" at -1727.36,-734.25 h50 r270
  text "0R" at 1780.51,-1062.01 h50
Mechanical 15:
  lines w39.37: -2855.31,-1220.47 2853.35,1220.47 ; -2855.31,1220.47 2853.35,-1220.47

## Dimensions
-2362.2,738.39 to 2362.2,742.13 on Mechanical 15
2240.35,868.11 to 2362.2,-1181.1 on Mechanical 15
-787.4,740.16 to -2362.2,-1181.1 on Mechanical 15

## Text inside footprints (layer, text, board x,y; h text height)
C22: Top Overlay "+" at -2148.36,-635.81 h118.11 r270
P1: Top Overlay "1" at 626.26,656.81 h50 r180; Top Overlay "2" at 646.26,556.81 h50 r180
USB1: Mechanical 1 "PCB Edge" at 2388.08,126.52 h9.84 r90